# Altium PCB ET-COM.PcbDoc
Units mil, origin at the board's own origin, x right, y up, seen from the top; angles counter-clockwise.
Board outline 2040 x 720 mil, 2 copper layers (TopLayer, BottomLayer); 16 components, 24 nets, 98 pads, 25 vias.
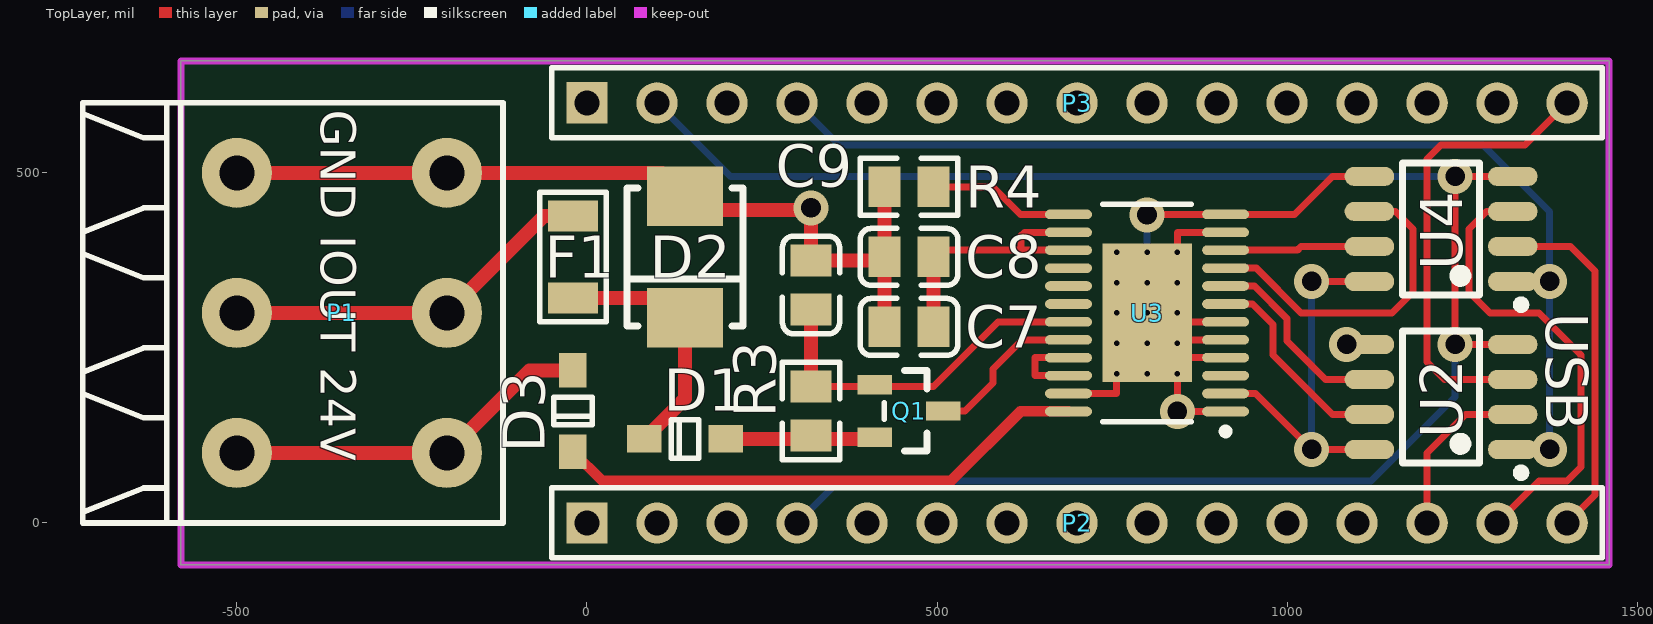
[diagram p0: TopLayer view]
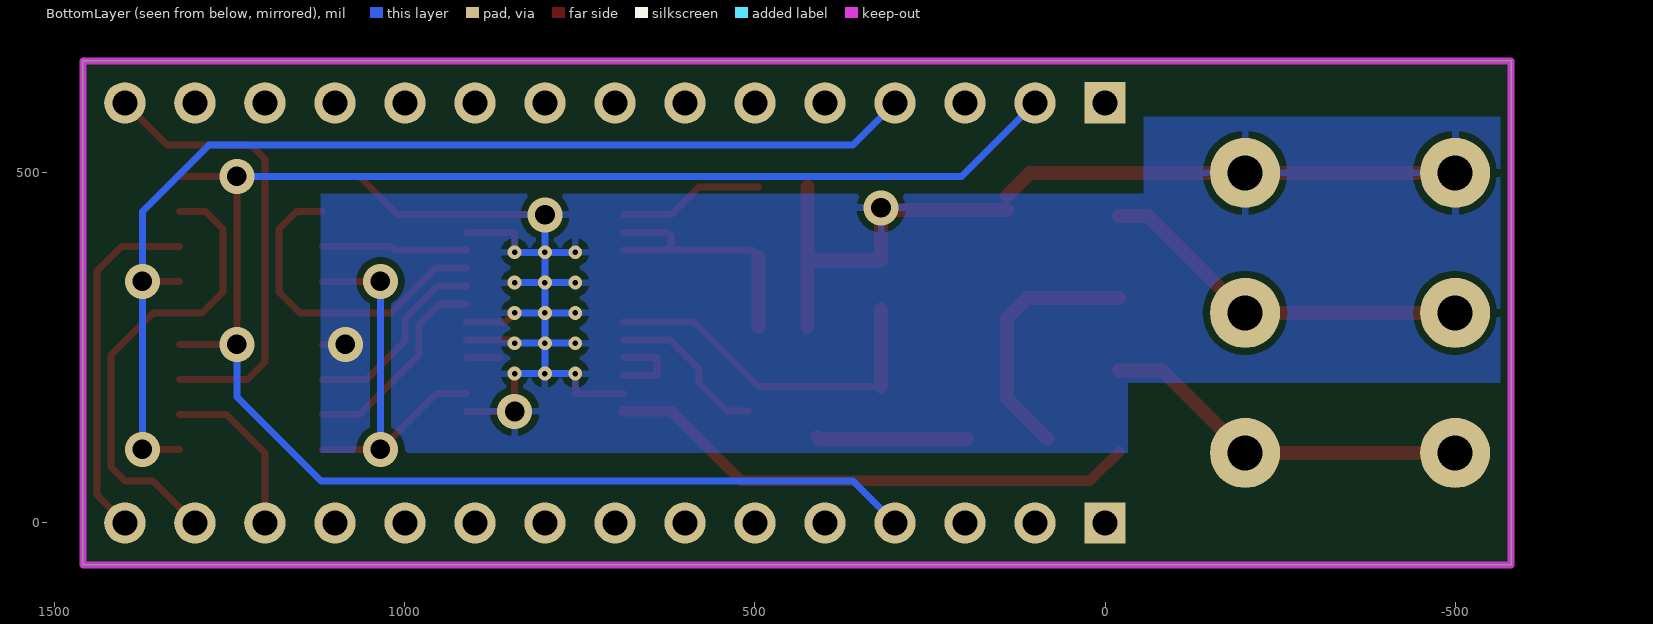
[diagram p1: BottomLayer view, seen from below]
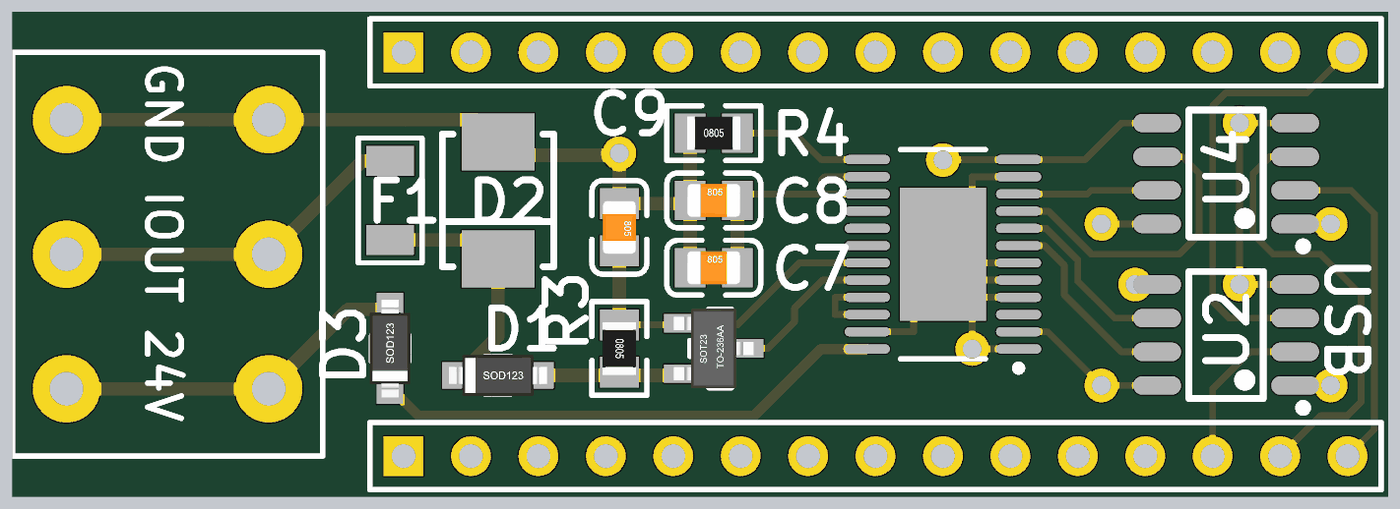
[diagram p2: 3D render of the assembled board from above, using the file's embedded part models]

## Layer stack, top to bottom
TopLayer: signal copper 1.4
Dielectric: core 12.6, FR-4, Dk 4.8
BottomLayer: signal copper 1.4

## Board outline
-580,-60 1460,-60 1460,660 -580,660

## Design rules (kind name [scope] priority, off if disabled: settings)
Clearance [All] p1: gap=10
ComponentClearance [All] p1 off: gap=10 collisioncheckmode=3 verticalgap=10 showdistances=FALSE
FabricationTestPointUsage TestPointUsage [All] p1: valid=0 allowmultiple=FALSE
FabricationTestpoint Testpoint [All] p1: side=3 testpointundercomponent=TRUE minsize=40 maxsize=100 preferedsize=60 minholesize=20 maxholesize=40 preferedholesize=32 testpointgrid=1 allowsidetop=TRUE allowsidebottom=TRUE usegrid=TRUE gridtolerance=0.01
PlaneClearance [All] p1: clearance=10
PolygonConnect [All] p1: connectstyle=Relief reliefconductorwidth=10 reliefentries=4 polygonreliefangle="90 Angle" airgapwidth=10
RoutingVias [All] p1: holewidth=28 width=50 viastyle="Through Hole" minholewidth=28 minwidth=50 maxholewidth=28 maxwidth=50
SilkToSolderMaskClearance SilkscreenOverComponentPads [IsPad] p1: minsilkscreentomaskgap=10 clearancetoexposedcopper=TRUE
SolderMaskExpansion [All] p1: expansion=2
Width [All] p1: maxlimit=30 minlimit=10 preferedwidth=10
23 further rules are at their usual default settings.

## Components (designator, comment, footprint, x,y, rotation, side; value= is the part's Value field where it differs from the comment)
C7 "1uF (105) 10% 50V" LC-0805_C 460,280 r0 top
C8 "100nF(104) 10% 50V" LC-0805_C 460,380 r0 top
C9 "22nF (223) 10% 50V" LC-0805_C 320,340 r270 top
D1 "B5819W  SL" LC-SOD-123 140,120 r0 top
D2 "P6SMB6.8CA" LC-SMB(DO-214AA)_S1 140,380 r90 top
D3 "B5819W  SL" SOD-123 -20,160 r90 top
F1 "Fuse 1" LC-1206_L -20,380 r90 top
P1 "Header 3" connector_x3 -500,100 r90 top
P2 "Header 15" HDR1X15 0,0 r0 top
P3 "Header 15" HDR1X15 0,600 r0 top
Q1 "2SC3356-T1B-A    S/YS档" LC-SOT-23(SOT-23-3) 460,160 r180 top
R3 "1KΩ (1001) ±1%" LC-0805_R 320,160 r270 top
R4 "15KΩ (1502) ±1%" LC-0805_R 460,480 r0 top
U2 "ADUM1200ARZ-RL7" LC-SOIC-8_150mil 1220,180 r90 top
U3 "AD5422AREZ" RE-24_N 800,300 r180 top
U4 "ADUM1201ARZ-RL7" LC-SOIC-8_150mil 1220,420 r90 top

## Footprints (in the part's own frame and the unit in brackets; to place one, negate y for a bottom-side part, rotate by r counter-clockwise, add the part's x,y. Pads: shape width x height; smd on the part's side, far side on the other; paste and mask are expansions set on the pad)
connector_x3 [mil]
  round 100 hole 50: 1(0,0) 1(0,-300) 2(200,-300) 2(200,0) 3(400,-300) 3(400,0)
  silkscreen extent -100,-380 500,220
HDR1X15 [mm] "Connector; Header; 15 Position"
  rect 1.5x1.5 hole 0.9: 1(0,0)
  round 1.5 hole 0.9: 2(2.54,0) 3(5.08,0) 4(7.62,0) 5(10.16,0) 6(12.7,0) 7(15.24,0) 8(17.78,0) 9(20.32,0) 10(22.86,0) 11(25.4,0) 12(27.94,0) 13(30.48,0) 14(33.02,0) 15(35.56,0)
  silkscreen extent -1.27,-1.27 36.83,1.27
LC-0805_C [mm]
  rect 1.16x1.47 smd: 1(-0.89,0) 2(0.89,0)
  silkscreen extent -1.77,-1.04 1.77,1.04, body extent -1,-0.62 1,0.63, height 0.77
LC-0805_R [mm]
  rect 1.16x1.47 smd: 1(-0.89,0) 2(0.89,0)
  silkscreen extent -1.77,-1.04 1.77,1.03, body extent -1,-0.62 1,0.63, height 0.49
LC-1206_L [mm]
  rect 1.13x1.8 smd: 1(-1.49,0) 2(1.49,0)
  silkscreen extent -2.36,-1.2 2.35,1.2
LC-SMB(DO-214AA)_S1 [mil]
  rect 85x107.99 smd: 1(87.01,0) 2(-87.01,0)
  silkscreen extent -98,-83 98,83
LC-SOD-123 [mm]
  rect 1.25x1 smd: 1(1.475,0) 2(-1.475,0)
  silkscreen extent -0.5,-0.7 0.5,0.7, body extent -1.85,-0.77 1.85,0.78, height 1.35
LC-SOIC-8_150mil [mm]
  oval 0.7x1.8 smd: 1(-1.905,-2.6) 2(-0.635,-2.6) 3(0.635,-2.6) 4(1.905,-2.6) 5(1.905,2.6) 6(0.635,2.6) 7(-0.635,2.6) 8(-1.905,2.6)
  silkscreen extent -2.9,-3.05 2.4,1.4
LC-SOT-23(SOT-23-3) [mm]
  rect 1.25x0.7 smd: 1(1.25,-0.95) 2(1.25,0.95) 3(-1.25,0)
  silkscreen extent -0.65,-1.46 0.9,1.46, body extent -1.5,-1.5 1.5,1.5, height 1.3
RE-24_N [mm] "TSOP, 24-Leads, Body 7.8x4.4mm, Pitch 0.65mm, Thermal pad 5.02x3.25 mm, IPC Medium Density"
  oval 1.7x0.35 smd: 1(-2.85,3.575) 2(-2.85,2.925) 3(-2.85,2.275) 4(-2.85,1.625) 5(-2.85,0.975) 6(-2.85,0.325) 7(-2.85,-0.325) 8(-2.85,-0.975) 9(-2.85,-1.625) 10(-2.85,-2.275) 11(-2.85,-2.925) 12(-2.85,-3.575) 13(2.85,-3.575) 14(2.85,-2.925) 15(2.85,-2.275) 16(2.85,-1.625) 17(2.85,-0.975) 18(2.85,-0.325) 19(2.85,0.325) 20(2.85,0.975) 21(2.85,1.625) 22(2.85,2.275) 23(2.85,2.925) 24(2.85,3.575)
  rect 3.25x5.02 smd: 25(0,0)
  silkscreen extent -2.98,-3.95 1.6,4.42, body extent -2.25,-3.95 2.25,3.95, height 1.2
SOD-123 [mm]
  rect 1.25x1 smd: 1(1.475,0) 2(-1.475,0)
  silkscreen extent -0.5,-0.7 0.5,0.7, body extent -1.85,-0.77 1.85,0.78, height 1.35

## Part data
C7: library part "0805 1uF (105) 10% 50V", "贴片电容"
C8: library part "0805 100nF(104) 10% 50V", "贴片电容"
C9: library part "0805 22nF (223) 10% 50V", "贴片电容"
D1 D3: library part "SOD-123 B5819W  SL", "肖特基二极管"
D2: library part "SMB/DO-214AA P6SMB6.8CA", "TVS"
F1: "Fuse"
P1: "Header, 3-Pin"
P2 P3: "Header, 15-Pin"
Q1: library part "SOT-23 2SC3356-T1B-A    S/YS档", "三极管"
R3: library part "0805 1KΩ (1001) 1%", "贴片电阻"
R4: library part "0805 15KΩ (1502) 1%", "贴片电阻"
U2: library part ADUM1201ARZ-RL7, "隔离器"
U3: "Single 16-Bit Current Source Digital-to-Analog Converter with Serial Interface and HART Connectivity, -40 to +85 degC, RE-24, Pb-Free, Tube"
U4: "隔离器"

## Via types
v1: diameter 19.68, hole 7.87, TopLayer to BottomLayer, 15 vias
v2: diameter 50, hole 28, TopLayer to BottomLayer, 10 vias

## Nets (pads, with @x,y where several pads share a name; then routed paths per layer and width w, separated by ;. In a path a pad name is that pad's centre, name@x,y a point inside that pad or via, vN(x,y) a via of type N, cw(c..) or ccw(c..) an arc to the next point about the centre after c; other vN are vias at no path point)
24V+: D3.1 P1.1 | length 528.9
  TopLayer w20: P1.1@-500,100 -200,100 -81.93,218.07 D3.1
+5V: P3.4 U2.1 U4.1 | length 1584.5
  TopLayer w10: U2.1 v2(1375,105) ; U4.1 v2(1375,345)
  BottomLayer w10: P3.4 360,540 1280,540 1375,445 v2(1375,105)
AGND: P2.4 P3.2 U2.4 U4.4 | length 2677.8
  TopLayer w10: U2.4 v2(1240,255) v2(1240,495) U4.4
  BottomLayer w10: P3.2 205,495 v2(1240,495) ; P2.4 360,60 1120,60 1240,180 v2(1240,255)
D11/MOSI: P2.14 U4.3 | length 673.1
  TopLayer w10: P2.14 1360,60 1400,60 1420,80 1420,240 1360,300 1290,300 1260,330 1260,420 1285,445 U4.3
D12/MISO: P2.15 U4.2 | length 508.7
  TopLayer w10: U4.2 1405,395 1440,360 1440,40 P2.15
D13/SCK: P3.15 U2.3 | length 655.9
  TopLayer w10: U2.3 1225,205 1200,230 1200,520 1220,540 1340,540 P3.15
D14/LATCH: P2.13 U2.2 | length 245.1
  TopLayer w10: P2.13 1200,100 1255,155 U2.2
DVCC: U2.8 U3.2 U4.8 | length 561.1
  TopLayer w10: U3.2 955.16,184.84 v2(1035,105) U2.8 ; v2(1035,345) U4.8
  BottomLayer w10: v2(1035,105) v2(1035,345)
IOUT: F1.2 P1.2 | length 537.4
  TopLayer w20: P1.2@-500,300 -200,300 -61.34,438.66 F1.2
LATCH: U2.7 U3.7 | length 296.2
  TopLayer w10: U3.7 950.64,312.8 980,283.43 980,240 1065,155 U2.7
NetC7_2: C7.2 C8.2 U3.14 U3.15 | length 387.3
  TopLayer w10: C8.2 504.61,389.57 620,389.57 ; U3.15 620,389.57 ; U3.14 624.84,415.16 620,410.31 620,389.57
  TopLayer w20: C7.2 C8.2
NetC9_2: C9.2 Q1.1 R3.1 U3.19 | length 515.9
  TopLayer w10: R3.1 495.04,195.04 587.2,287.2 U3.19
  TopLayer w20: R3.1 C9.2
NetD1_1: D1.1 Q1.2 R3.2 | length 213.8
  TopLayer w20: D1.1 408.19,120 Q1.2
NetD1_2: D1.2 D2.2 F1.1 | length 368.8
  TopLayer w20: F1.1 111.65,321.34 D2.2 140,178.07 D1.2
NetQ1_3: Q1.3 U3.20 | length 232.4
  TopLayer w10: Q1.3 540,160 580,200 580,220 621.61,261.61 U3.20
NetR4_2: R4.2 U3.13 | length 209
  TopLayer w10: R4.2 580,480 619.25,440.75 U3.13
NetU3_21: U3.21 U3.22 | length 121.2
  TopLayer w10: U3.22 640,210.43 640,236.02 U3.21
OGND: C7.1 C8.1 C9.1 D2.1 P1.3 R4.1 U2.5 U3.1 U3.4 U3.5 U3.6 U3.11 U3.12 U3.23 U3.25 U4.5 | length 2750.1
  TopLayer w10: U3.23 756.69,184.84 v1(756.69,213.39) ; v2(800,440) 800,440.75 U3.12 1010.75,440.75 1065,495 U4.5 ; v1(843.31,213.39) v2(843.31,159.25) U3.1 ; v1(843.31,256.69) 848.23,261.61 U3.5 ; v1(843.31,300) 856.1,287.2 U3.6 ; v1(843.31,386.61) 843.31,415.16 U3.11 ; 863.98,236.02 U3.4 ; v2(1085,255) U2.5
  TopLayer w20: P1.3@-500,500 107.01,500 D2.1 ; D2.1@140,447.01 320,447.01 C9.1 C8.1@420,375.04 ; C7.1 C8.1 R4.1
  BottomLayer w10: v1(756.69,213.39) v1(800,213.39) ; v1(756.69,256.69) v1(800,256.69) ; v1(756.69,300) v1(800,300) ; v1(756.69,343.31) v1(800,343.31) ; v1(756.69,386.61) v1(800,386.61) ; v2(800,440) v1(800,386.61) ; v1(843.31,213.39) v1(800,213.39) ; v1(843.31,256.69) v1(800,256.69) ; v1(843.31,300) v1(800,300) ; v1(843.31,343.31) v1(800,343.31) ; v1(843.31,386.61) v1(800,386.61) ; v1(800,213.39) v1(800,256.69) ; v1(800,256.69) v1(800,300) ; v1(800,300) v1(800,343.31) ; v1(800,343.31) v1(800,386.61)
  other v2: 320,450
SCL: P3.7
SCLK: U2.6 U3.8 | length 279.3
  TopLayer w10: U3.8 953.33,338.39 1000,291.72 1000,260 1055,205 U2.6
SDA: P3.8
SDIN: U3.9 U4.6 | length 469.4
  TopLayer w10: U3.9 956.02,363.98 1020,300 1150,300 1180,330 1180,420 1155,445 U4.6
SDO: U3.10 U4.7 | length 207.7
  TopLayer w10: U3.10 1014.57,389.57 1020,395 U4.7
V+: D3.2 U3.24 | length 766.3
  TopLayer w15: D3.2 21.93,60 520,60 619.25,159.25 U3.24
pads on no net: P2.1 P2.2 P2.3 P2.5 P2.6 P2.7 P2.8 P2.9 P2.10 P2.11 P2.12 P3.1 P3.3 P3.5 P3.6 P3.9 P3.10 P3.11 P3.12 P3.13 P3.14 U3.3 U3.16 U3.17 U3.18

## Polygon pours and split planes (outlines as drawn)
OGND on BottomLayer "BottomLayer-No Net" (solid, remove dead copper, pour order 4): 1120,470 1120,100 1.88,100 -32.35,100 -32.35,200 -580,200 -580,580 -55.17,580 -55.17,470

## Keep-outs
KeepOutLayer:
  lines w10: -580,-60 1460,-60 1460,660 -580,660 -580,-40 -580,-60

## Silkscreen, mask and mechanical layers (free items; w line width, h text height)
TopOverlay:
  text "GND IOUT 24V" at -380,590 h50 r270
  text "USB" at 1370,300 h60 r270